# EAGLE board BSPD - Amphion R (2) (EAGLE 9.6.2)
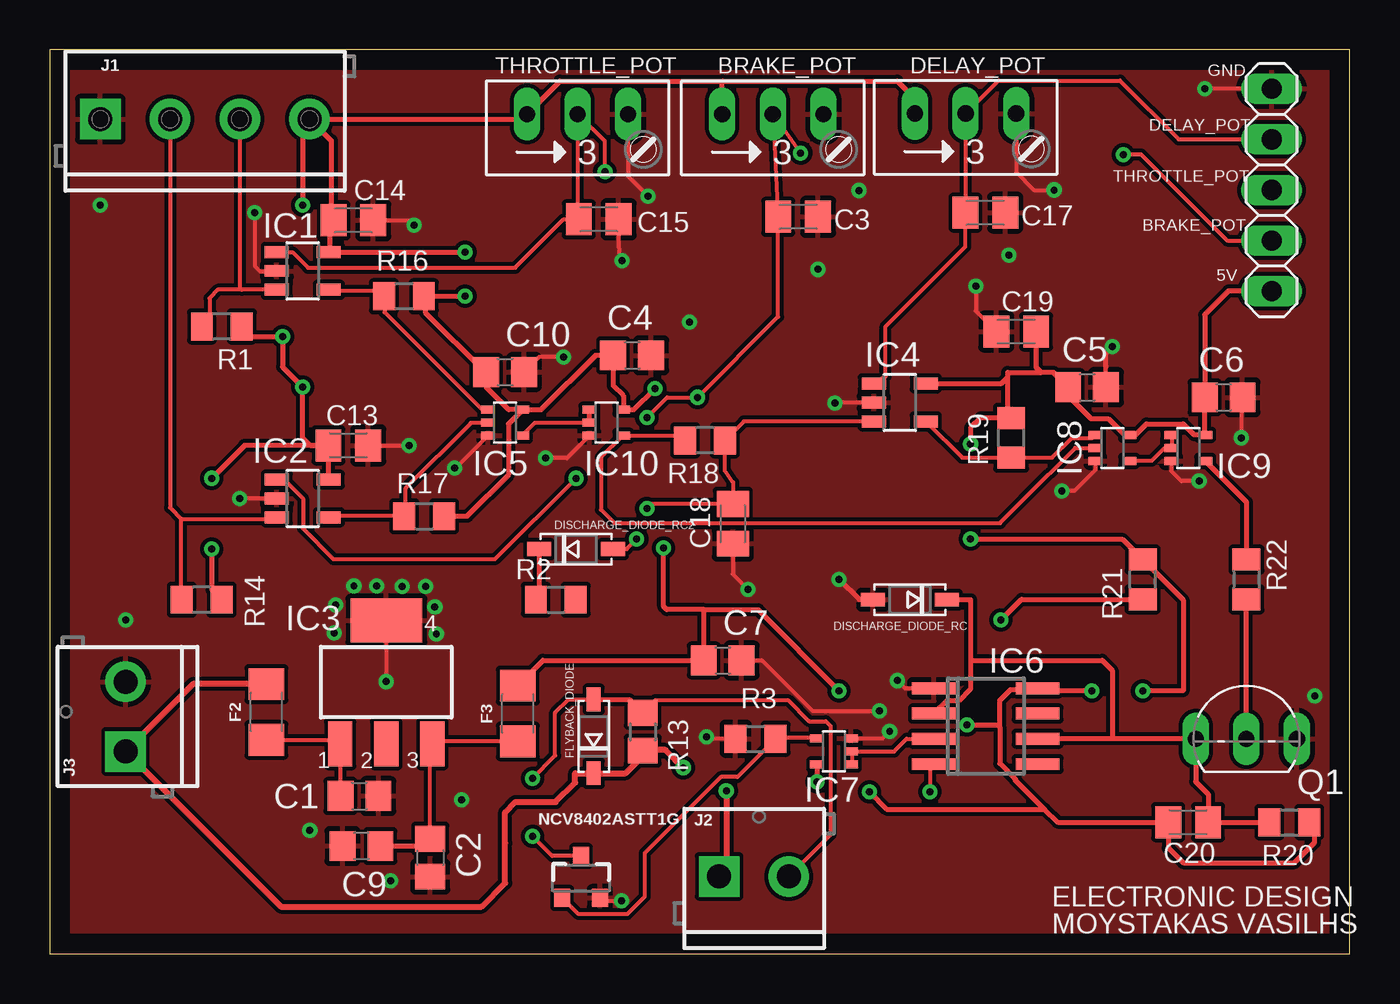
[diagram p0: board, top side]
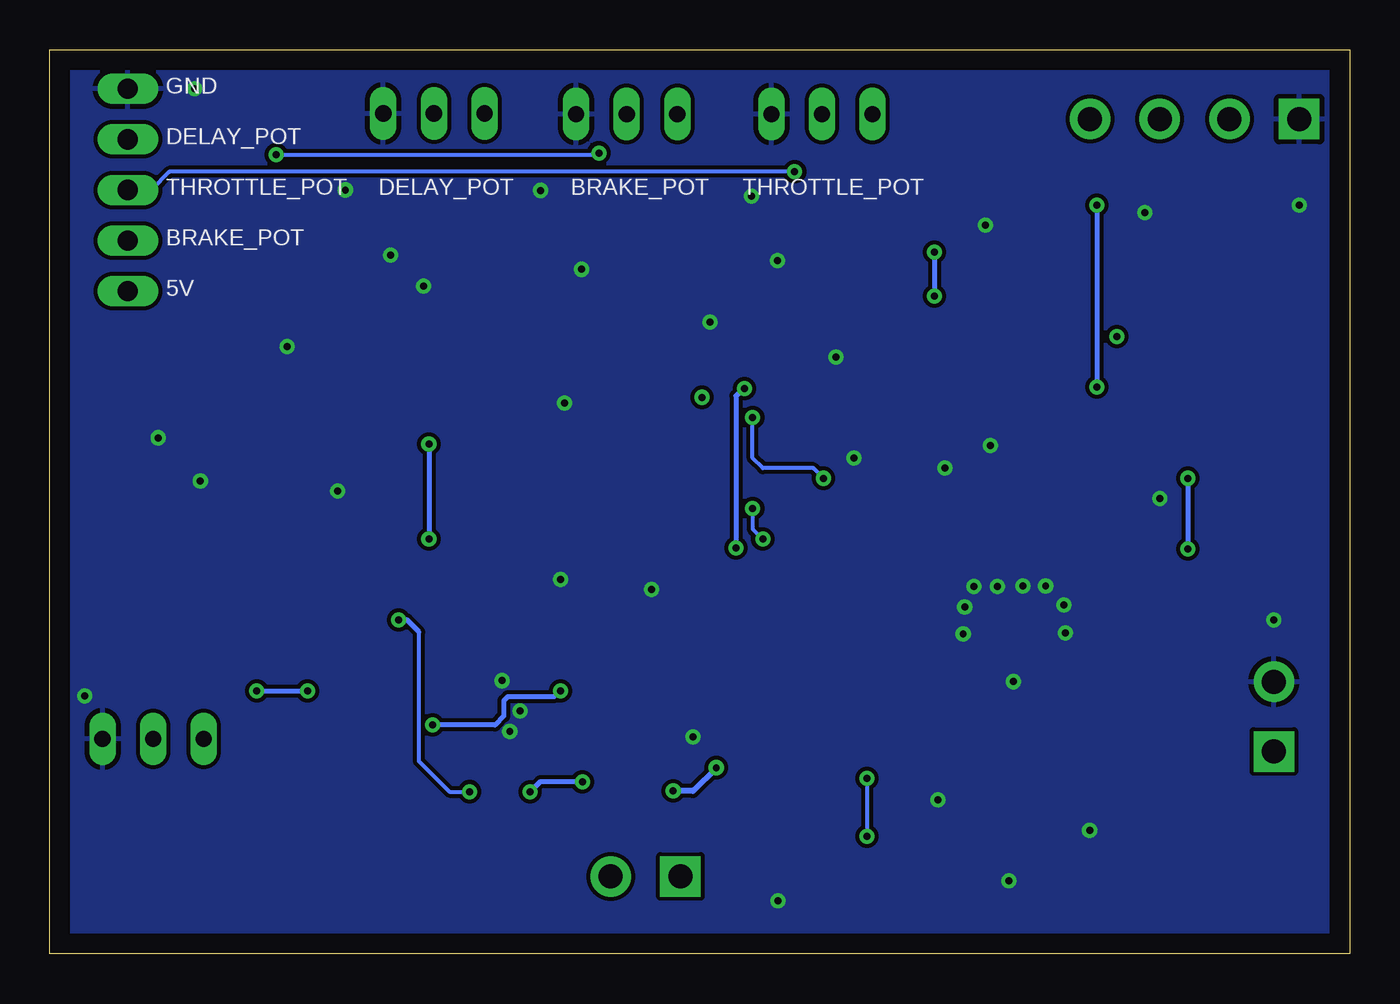
[diagram p1: board, bottom side, seen from below]

Size 65.26 x 45.39 mm. Coordinates in mm from the lower left corner, seen from the top.
Outline: 0,0 65.26,0 65.26,45.39 0,45.39 0,0
Copper layers (1*16): Top 0.035mm / dielectric 1.5mm / Bottom 0.035mm
Design rules "Micron_20 (1)": minimum track width 6mil, minimum drill 0.35mm, track to track 8mil, track to pad 8mil, pad to pad 8mil, via to via 8mil, smd to smd 8mil, copper to edge 40mil, drill to drill 6mil, minimum pad ring 10mil, minimum via ring 8mil, stop-mask expansion 4mil, vias tented up to drill 0mil, thermal gap 10mil
Net classes: 0 default: width 0.203 mm; 1 5V: width 0.254 mm

## Footprints (pad centres in the part's own frame; a part is rotated, then mirrored left to right if it is on the bottom)
C0805 = smd 1.3 x 1.5: 1 -0.95,0; 2 0.95,0
C0805K = smd 1.3 x 1.6: 1 -1,0; 2 1,0
SOD-123 = smd 1.2 x 0.7: A 1.85,0; C -1.85,0
1206 = smd 1.6 x 1.8: 1 -1.4,0; 2 1.4,0
DBV-R-PDSO-G5 = smd 0.6 x 1.2: 1 -0.95,-1.306; 2 0,-1.306; 3 0.95,-1.306; 4 0.95,1.306; 5 -0.95,1.306
SOT223 = smd 1.219 x 2.235: 1 -2.311,-3.099; 2 0,-3.099; 3 2.311,-3.099 | smd 3.6 x 2.2: 4 0,3.099
SC70-5 = smd 0.4 x 0.7: 1 -0.65,-0.85; 2 0,-0.85; 3 0.65,-0.85; 4 0.65,0.85; 5 -0.65,0.85
SO08 = smd 0.6 x 2.2: 1 -1.905,-2.6; 2 -0.635,-2.6; 3 0.635,-2.6; 4 1.905,-2.6; 5 1.905,2.6; 6 0.635,2.6; 7 -0.635,2.6; 8 -1.905,2.6
SCREWTERMINAL-3.5MM-4 = drill 1.2 pad 2.032 square: 1 0,0 | drill 1.2 pad 2.032: 2 3.5,0; 3 7,0; 4 10.5,0
SCREWTERMINAL-3.5MM-2 = drill 1.2 pad 2.032 square: 1 0,0 | drill 1.2 pad 2.032: 2 3.5,0
1X05 = drill 1.016 long: 1 -5.08,0; 2 -2.54,0; 3 0,0; 4 2.54,0; 5 5.08,0
SOT23-3 = smd 0.8 x 0.9: 1 -0.95,-1; 2 0.95,-1; 3 0,1.1
TO92-EBC = drill 0.813 long: B 0,-1.27; C -2.54,-1.27; E 2.54,-1.27
R0805 = smd 1.1 x 1.4: 1 -1,0; 2 1,0
RJ9W = drill 0.813 long: A 2.54,0.635; E -2.54,0.635; S 0,0.635
R0805' = smd 1.3 x 1.5: 1 -0.95,0; 2 0.95,0

## Placement (x,y rotation side)
C1  0.22u  [C0805]  15.54,7.92 0 top
C2  100n  [C0805]  19.1,4.83 270 top
C3  100n  [C0805K]  37.57,37.01 0 top
C4  0.1uF  [C0805]  29.24,30.05 0 top
C5  0.1uF  [C0805]  52.07,28.45 0 top
C6  0.1uF  [C0805]  58.93,27.94 0 top
C7  0.1uF  [C0805]  33.78,14.73 0 top
C9  100p  [C0805]  15.65,5.41 180 top
C10  0.1uF  [C0805]  22.86,29.21 0 top
C13  0.1μF  [C0805K]  14.99,25.53 0 top
C14  0.1μF  [C0805K]  15.24,36.83 0 top
C15  100n  [C0805K]  27.56,36.88 0 top
C17  100n  [C0805K]  46.96,37.21 0 top
C18  100μF  [C0805K]  34.29,21.59 90 top
C19  0.1μF  [C0805K]  48.51,31.24 0 top
C20  100μF  [C0805K]  57.15,6.6 180 top
DISCHARGE_DIODE_RC  [SOD-123]  43.18,17.78 180 top
DISCHARGE_DIODE_RC2  [SOD-123]  26.42,20.32 0 top
F2  13V/1A  [1206]  10.87,12.14 90 top
F3  6V/1A  [1206]  23.5,12.06 90 top
FLYBACK_DIODE  [SOD-123]  27.3,10.92 90 top
IC1  TL331  [DBV-R-PDSO-G5]  12.7,34.29 270 top
IC2  TL331  [DBV-R-PDSO-G5]  12.7,22.86 270 top
IC3  LM340MP-05  [SOT223]  16.89,13.64 0 top
IC4  TL331  [DBV-R-PDSO-G5]  42.67,27.69 270 top
IC5  74AHC1G00DCK  [SC70-5]  22.86,26.67 270 top
IC6  LM555D  [SO08]  46.99,11.43 270 top
IC7  74AHC1G00DCK  [SC70-5]  39.37,10.16 90 top
IC8  74AHC1G00DCK  [SC70-5]  53.34,25.4 270 top
IC9  74AHC1G00DCK  [SC70-5]  57.15,25.4 270 top
IC10  74AHC1G00DCK  [SC70-5]  27.94,26.67 270 top
J1  [SCREWTERMINAL-3.5MM-4]  2.54,41.91 0 top
J2  [SCREWTERMINAL-3.5MM-2]  33.6,3.89 0 top
J3  [SCREWTERMINAL-3.5MM-2]  3.81,10.16 90 top
JP1  [1X05]  61.34,38.35 90 top
NCV8402ASTT1G  5.8A/30V/35mΩ  [SOT23-3]  26.67,3.81 0 top
Q1  BC548B  [TO92-EBC]  60.07,12.06 0 top
R1  50k  [R0805]  8.64,31.5 180 top
R2  100  [R0805]  25.4,17.78 0 top
R3  10K  [R0805]  35.43,10.79 0 top
R4  [RJ9W]  36.3,41.53 0 top
R5  [RJ9W]  45.97,41.55 0 top
R6  [RJ9W]  26.49,41.53 0 top
R13  10k  [R0805']  29.77,11.15 270 top
R14  50k  [R0805]  7.62,17.78 180 top
R16  5k  [R0805]  17.78,33.02 0 top
R17  5k  [R0805]  18.8,21.97 0 top
R18  5.1k  [R0805]  32.89,25.78 180 top
R19  5k  [R0805]  48.26,25.91 90 top
R20  92k  [R0805]  62.23,6.6 0 top
R21  5k  [R0805]  54.86,18.8 90 top
R22  2.4k  [R0805]  60.07,18.8 270 top

## Library data of the parts
C1 C2 C4-C7 C9 C10 = rcl
C3 C13-C15 C17-C20 DISCHARGE_DIODE_RC DISCHARGE_DIODE_RC2 FLYBACK_DIODE R1-R3 R14 R16-R22 = crt
F2 F3 = crt; PROD_ID: RES-08585
IC1-IC4 IC6 = linear
IC5 IC7-IC10 = 74xx-little-de
J1 = SparkFun-Connectors; PROD_ID: 2xCONN-08399; SF_ID: 2xPRT-08084
J2 J3 = SparkFun-Connectors; PROD_ID: CONN-08399
JP1 = pinhead
NCV8402ASTT1G = SparkFun-DiscreteSemi; PROD_ID: TRANS-12988
Q1 = transistor-npn
R4-R6 = pot
R13 = resistor

## Nets
+5V [5V]: C4.1 C5.1 C6.1 C7.1 C10.1 C13.1 C14.1 C19.2 C20.2 F3.2 IC1.5 IC2.5 IC4.5 IC5.5 IC6.8 IC7.5 IC8.5 IC9.5 IC10.5 J1.4 JP1.1 R1.1 R4.E R5.E R6.E R14.1 R16.2 R17.2 R19.2 R20.2 R21.2
+12V: F2.2 FLYBACK_DIODE.C J2.1 J3.1 R13.2
AND_VOLTAGE: IC8.2 IC10.4 R18.2
BRAKE_POT: C3.1 IC2.1 JP1.2 R4.S
BREAK_PRESS_VOUT: IC2.3 J1.2 R14.2
DELAY_POT: C17.1 IC4.1 JP1.4 R5.S
GND: C1.2 C2.2 C3.2 C4.2 C5.2 C6.2 C7.2 C9.2 C10.2 C13.2 C14.2 C15.2 C17.2 C18.1 C19.1 DISCHARGE_DIODE_RC.A IC1.2 IC2.2 IC3.4 IC4.2 IC5.3 IC6.1 IC7.3 IC8.3 IC9.3 IC10.3 J1.1 J3.2 JP1.5 NCV8402ASTT1G.2 Q1.E R3.1 R4.A R5.A R6.A
GND2: C18.2 DISCHARGE_DIODE_RC2.A IC4.3 R18.1
N$1: IC1.4 IC5.1 R16.1
N$2: IC2.4 IC5.2 R17.1
N$3: IC4.4 IC8.1 R19.1
N$4: DISCHARGE_DIODE_RC2.C R2.1
N$5: IC5.4 IC10.1 IC10.2
N$6: IC9.4 R22.1
N$7: Q1.B R22.2
N$8: IC6.4 R21.1
N$9: C20.1 DISCHARGE_DIODE_RC.C IC6.2 IC6.6 Q1.C R20.1
N$10: IC6.3 IC7.1 IC7.2
N$11: IC7.4 NCV8402ASTT1G.1 R3.2
N$12: C2.1 C9.1 F3.1 IC3.3
N$13: IC8.4 IC9.1 IC9.2
N$14: C1.1 F2.1 IC3.1
N$15: FLYBACK_DIODE.A J2.2 NCV8402ASTT1G.3 R13.1
N$17: R2.2
THROTTLE_POS: IC1.3 J1.3 R1.2
THROTTLE_POT: C15.1 IC1.1 JP1.3 R6.S

## Tracks (layer width: path | path; a pad name or v marks a point on that pad's centre or on a via)
+5V  (via drill 0.35)
  Top 0.254: 32.83,17.28 C7.1 24.76,14.73 F3.2 | JP1.1 59.17,33.27 57.98,32.08 C6.1 57.96,27.93 57.96,26.07 IC9.5 57.45,26.05 56.9,26.61 55.05,26.61 54.5,26.05 IC8.5 54.14,26.07 53.94,26.07 53.14,26.87 52.27,26.87 51.12,28.03 C5.1 50.38,29.18 49.78,29.18 | 49.78,29.18 48.09,29.18 48.09,28.96 | IC5.5 23.04,27.32 21.91,28.45 C10.1 21.78,29.27 18.85,32.21 18.85,32.95 R16.2 v20.85,33.02 | R17.2 20.95,21.97 23.02,24.04 23.02,26.61 23.65,27.23 IC5.5 | v39.62,13.21 35.55,17.28 32.83,17.28 | 47.68,11.4 47.68,12.7 48.25,13.27 49.52,13.27 IC6.8 49.72,13.21 v52.32,13.21 | v46.04,11.49 47.59,11.49 47.68,11.4 | 47.68,11.4 47.69,11.39 47.69,9.56 48.48,8.77 48.43,8.77 49.94,7.26 | J1.4 14.13,40.83 14.13,36.92 C14.1 14.22,36.83 14.05,36.65 14.05,35.32 IC1.5 v20.85,35.23 | R20.2 63.5,6.33 63.5,5.59 62.48,4.57 56.9,4.57 56.15,5.32 C20.2 50.6,6.6 49.94,7.26 | IC5.5 24.67,27.32 27.4,30.05 C4.1 28.29,28.52 28.79,28.02 IC10.5 29.32,27.32 v30.38,28.39 | J1.4 23.7,41.91 R6.E 25.6,43.82 33.78,43.82 | J1.4 12.7,41.57 v12.7,37.59 | 33.78,43.82 42.55,43.82 43.43,42.93 R5.E | R4.E 33.76,43.79 33.78,43.82 | IC2.5 14.01,25.51 C13.1 | C13.1 13.08,25.53 12.7,25.91 v12.7,28.45 11.68,29.46 v11.68,30.99 10.14,30.99 R1.1 | C13.1 9.78,25.53 v8.13,23.88 | v8.13,20.32 8.13,18.27 R14.1 | v30.81,20.37 30.81,17.43 30.96,17.28 32.83,17.28 | IC7.5 v38.52,8.64 | v41.15,8.13 42.01,7.26 49.94,7.26 | 48.09,28.96 48.09,27.07 R19.2 46.72,26.91 46.23,26.42 v46.23,25.59 | v46.23,20.83 53.83,20.83 R21.2 56.9,17.76 56.9,13.21 v54.86,13.21 | IC4.5 47.77,28.64 48.09,28.96 | C19.2 49.51,29.46 49.78,29.18
  Bottom 0.254: v39.62,13.21 39.93,12.9 42.27,12.9 42.47,12.7 42.47,11.94 42.91,11.49 v46.04,11.49 | v12.7,37.59 v12.7,28.45 | v20.85,35.23 v20.85,33.02 | v30.81,20.37 30.81,28 30.43,28.39 v30.38,28.39 | v8.13,23.88 v8.13,20.32 | v38.52,8.64 40.64,8.64 v41.15,8.13 | v46.23,25.59 v46.23,20.83 | v54.86,13.21 v52.32,13.21
+12V  (via drill 0.35)
  Top 0.254: 29.77,9.93 R13.2 29.8,10.24
  Top 0.305: 29.77,9.93 28.91,9.07 FLYBACK_DIODE.C 26.37,9.07 26.37,8.59 25.4,7.62 23.37,7.62 22.86,7.11 22.86,5.56 22.86,3.56 21.67,2.36 11.61,2.36 J3.1 7.19,13.54 F2.2 | v31.8,9.35 30.91,10.24 29.8,10.24 | v33.96,8.18 33.96,4.24 J2.1
  Bottom 0.305: v31.8,9.35 32.97,8.18 v33.96,8.18
AND_VOLTAGE
  Top 0.203: IC8.2 51.47,25.4 48.85,22.78 47.7,21.63 28.35,21.63 27.67,22.3 27.67,24.94 28.71,25.98 | IC10.4 31.65,26.02 R18.2
  Top 0.254: IC10.4 28.75,25.98 28.71,25.98
BRAKE_POT  (via drill 0.35)
  Top 0.203: IC2.1 11.47,23.76 11.82,23.76 12.71,22.87 12.71,21.36 14.22,19.81 22.35,19.81 v26.42,23.88 | 36.56,36.97 C3.1 | v29.97,26.92 30.99,27.94 v32.51,27.94 36.56,31.99 36.56,36.97 | 36.56,36.97 R4.S v37.69,40.21 | JP1.2 59.11,35.81 54.79,40.13 v53.9,40.13
  Bottom 0.203: v26.42,23.88 26.92,24.38 29.46,24.38 29.97,24.89 v29.97,26.92 | v37.69,40.21 37.77,40.13 v53.9,40.13
BREAK_PRESS_VOUT
  Top 0.203: IC2.3 11.33,21.84 6.6,21.84 | R14.2 6.6,17.8 6.6,21.84 | J1.2 6.04,22.41 6.6,21.84
DELAY_POT
  Top 0.203: IC4.1 41.96,29 41.96,31.5 45.97,35.5 C17.1 R5.S 47.62,43.84 53.72,43.84 56.67,40.89 JP1.4
GND  (via drill 0.35)
  Top 0.203: IC1.2 10.54,34.29 10.29,34.54 v10.29,37.21 | C14.2 18.03,36.83 v18.29,36.58 | IC2.2 v9.53,22.86 | NCV8402ASTT1G.2 27.76,2.67 v28.7,2.67 | IC5.3 20.37,24.38 v20.32,24.38 | v25.78,29.97 24.57,29.97 C10.2 | R3.1 33.07,10.79 v32.97,10.9 | IC7.3 41.8,10.81 v42.16,11.18 | v42.55,13.72 42.93,13.33 IC6.1 | v57.7,23.73 56.81,23.73 56.3,24.24 IC9.3 | C6.2 59.82,27.88 v59.82,25.91 | JP1.5 58.04,43.43 58.01,43.46 v57.99,43.43 | v46.48,33.53 46.48,32.27 C19.1 | C18.1 34.29,19.05 v35.05,18.29 | IC4.2 39.45,27.69 v39.42,27.66 | IC8.3 52.49,24.3 51.44,23.24 v50.8,23.24 | C5.2 53.02,29.46 53.02,29.65 | IC10.3 25.96,24.89 v24.89,24.89 | C7.2 35.75,14.73 38.29,12.19 v41.66,12.19 | IC3.4 v16.89,13.66 | C15.2 28.6,34.93 v28.73,34.8 | R6.A 29.03,39.04 v30.02,38.05 | R5.A 48.51,39.24 49.4,38.35 v50.42,38.35 | C13.2 v18.03,25.53
  Top 0.254: DISCHARGE_DIODE_RC.A 40.64,17.78 v39.62,18.8 | 53.02,29.46 53.02,30.16 v53.34,30.48
  other vias: 2.54,37.59 3.81,16.76 63.5,12.95 19.41,16.05 19.33,17.42 18.87,18.44 17.68,18.44 16.41,18.47 15.27,18.47 14.35,17.53 14.27,16.1 17.12,3.66 32.11,31.72 38.56,34.37 40.61,38.33 48.16,35.08 20.68,7.72 13.06,6.2
  pour Bottom: 0,45.47 0,0 65.28,0 65.28,45.47
  pour Top: 12.34,19.02 12.34,2.74 21.34,2.74 21.34,19.02
  pour Top: 0,45.72 0,-0.51 65.53,-0.51 65.53,45.21 65.02,45.72 0.51,45.72
GND2  (via drill 0.35)
  Top 0.203: IC4.3 34.85,26.74 R18.1 33.89,24.27 34.3,23.66 34.3,22.6 C18.2 30.21,22.59 v29.97,22.35 | v29.46,20.83 28.96,20.32 DISCHARGE_DIODE_RC2.A
  Bottom 0.203: v29.97,22.35 29.97,21.34 v29.46,20.83
N$1
  Top 0.203: IC1.4 14.05,33.27 16.54,33.27 16.71,33.1 R16.1 16.8,33 16.8,32.22 21.7,27.32 IC5.1
N$2
  Top 0.203: IC2.4 14.05,21.98 17.69,21.98 R17.1 17.87,21.98 17.87,23.38 21.12,26.63 21.14,26.65 21.16,26.67 IC5.2
N$3
  Top 0.203: IC8.1 52.35,25.91 51.31,25.91 50.31,24.91 R19.1 45.81,24.91 IC4.4
N$4
  Top 0.254: DISCHARGE_DIODE_RC2.C 24.57,17.95 R2.1
N$5
  Top 0.203: IC5.4 24.36,26.67 IC10.2
  Top 0.254: IC10.2 IC10.1
N$6
  Top 0.254: IC9.4 60.07,22.68 R22.1
N$7
  Top 0.254: Q1.B R22.2
N$8  (via drill 0.35)
  Top 0.203: v44.18,8.14 44.18,9.27 44.36,9.45 IC6.4
  Top 0.254: v47.75,16.76 48.78,17.8 R21.1
  Bottom 0.203: 46.72,16.15 46.72,9.66 45.2,8.14 v44.18,8.14
  Bottom 0.254: 46.72,16.15 47.33,16.76 v47.75,16.76
N$9
  Top 0.254: R20.1 C20.1 58.17,6.62 58.17,8 57.53,8.64 Q1.C 53.34,10.79 | 53.34,10.79 IC6.6 | DISCHARGE_DIODE_RC.C 46.23,17.78 46.23,14.73 | IC6.2 45.03,12.7 45.63,12.7 46.23,13.31 46.23,14.73 | 46.23,14.73 52.83,14.73 53.34,14.22 53.34,10.79
N$10
  Top 0.203: IC7.1 40.27,9.54 40.27,10.16 IC7.2 42.38,10.16 43.02,10.79 IC6.3
N$11
  Top 0.203: IC7.4 38.49,10.87 36.51,10.87 R3.2 34.52,8.88 33.69,8.88 29.86,5.05 29.86,2.86 28.98,1.98 26.55,1.98 NCV8402ASTT1G.1
N$12
  Top 0.203: C2.1 19.1,10.44 IC3.3 19.33,10.66 F3.1
  Top 0.254: C9.1 18.73,5.41 C2.1
N$13
  Top 0.203: IC8.4 55.31,24.75 55.92,25.36 56.27,25.36 IC9.2 56.36,25.45 56.36,25.98 IC9.1
N$14
  Top 0.203: F2.1 14.38,10.74 IC3.1 | C1.1 14.6,10.53
  Top 0.254: 14.6,10.53 IC3.1
N$15  (via drill 0.35)
  Top 0.203: FLYBACK_DIODE.A 26.04,12.77 25.38,12.11 25.38,9.96 v24.23,8.81 | NCV8402ASTT1G.3 25.22,4.91 v24.23,5.9 | J2.2 39.2,5.99 39.2,11.43 38.96,11.67 38.11,11.67 37.05,12.74 30.41,12.74 R13.1
  Top 0.254: FLYBACK_DIODE.A 29.1,12.77 R13.1
  Bottom 0.203: v24.23,8.81 v24.23,5.9
THROTTLE_POS
  Top 0.203: R1.2 8.02,31.88 8.02,32.92 8.44,33.34 9.65,33.34 | IC1.3 9.65,33.34 | 9.65,33.34 9.54,33.45 J1.3
THROTTLE_POT  (via drill 0.35)
  Top 0.203: v27.86,39.27 27.86,40.79 R6.S 26.49,36.95 C15.1 25.8,36.88 23.37,34.45 12.96,34.45 12.18,35.23 11.4,35.23 IC1.1
  Bottom 0.203: JP1.3 60.17,38.35 59.26,39.27 v27.86,39.27

## Text on the board
tPlace: THROTTLE_POT | BRAKE_POT | DELAY_POT | GND | DELAY_POT | THROTTLE_POT | BRAKE_POT | 5V | ELECTRONIC DESIGN / MOYSTAKAS VASILHS
bPlace: GND | DELAY_POT | THROTTLE_POT | BRAKE_POT | DELAY_POT | THROTTLE_POT | BRAKE_POT | 5V